# Altium PCB PCB1_DEC17.pcbdoc (part 1 of 2)
Units mil, origin at the board's own origin, x right, y up, seen from the top; angles counter-clockwise.
Board outline 5000 x 5000 mil, 2 copper layers (Top Layer, Bottom Layer); 78 components, 60 nets, 282 pads, 32 vias.
Unrouted connection lines stored in the file: 84.
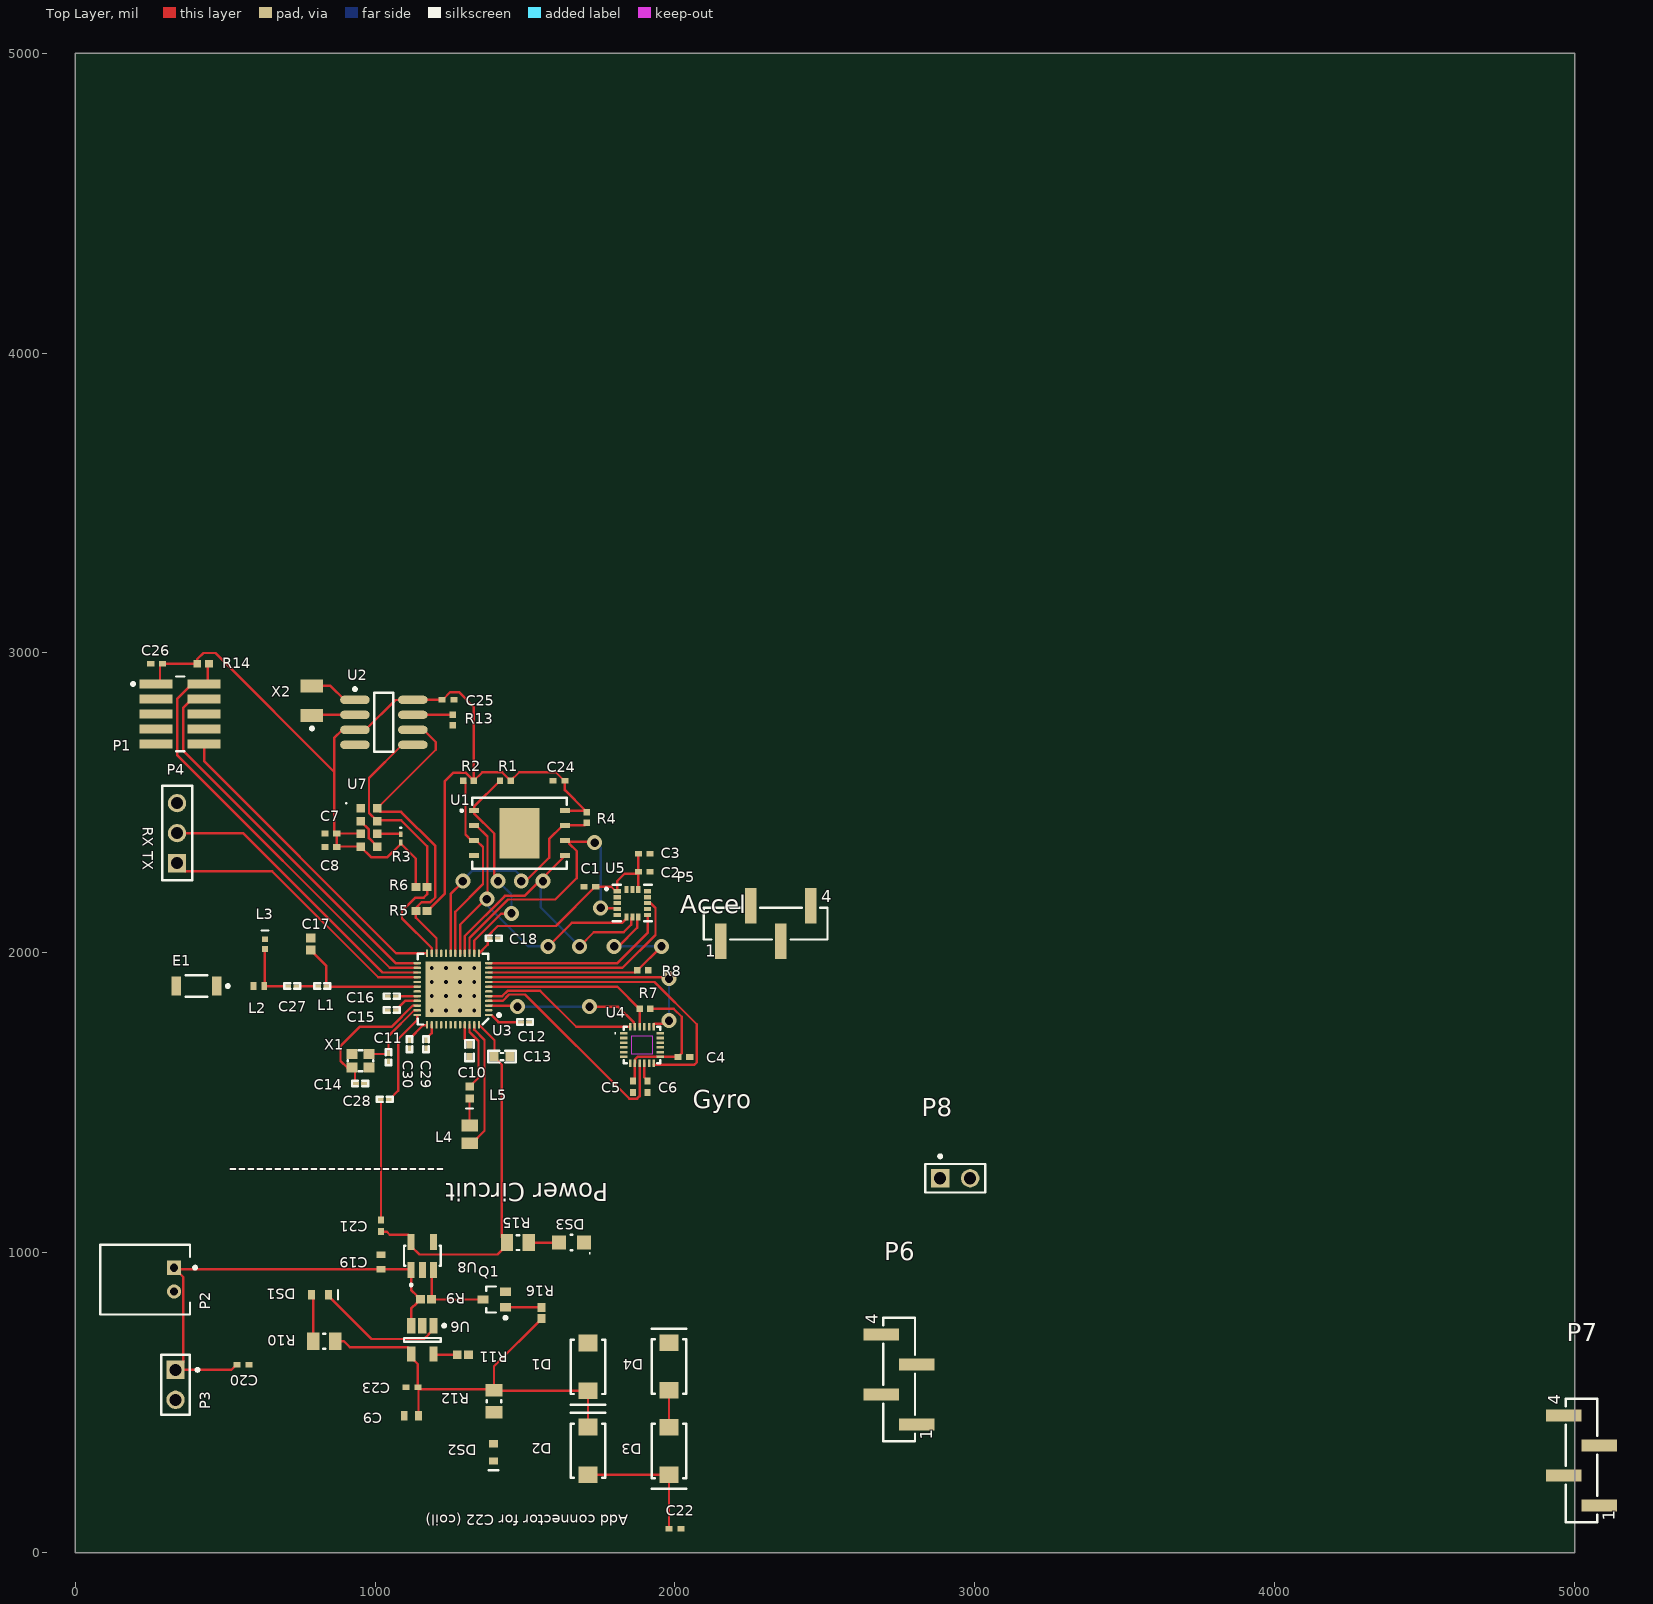
[diagram p0: Top Layer view]
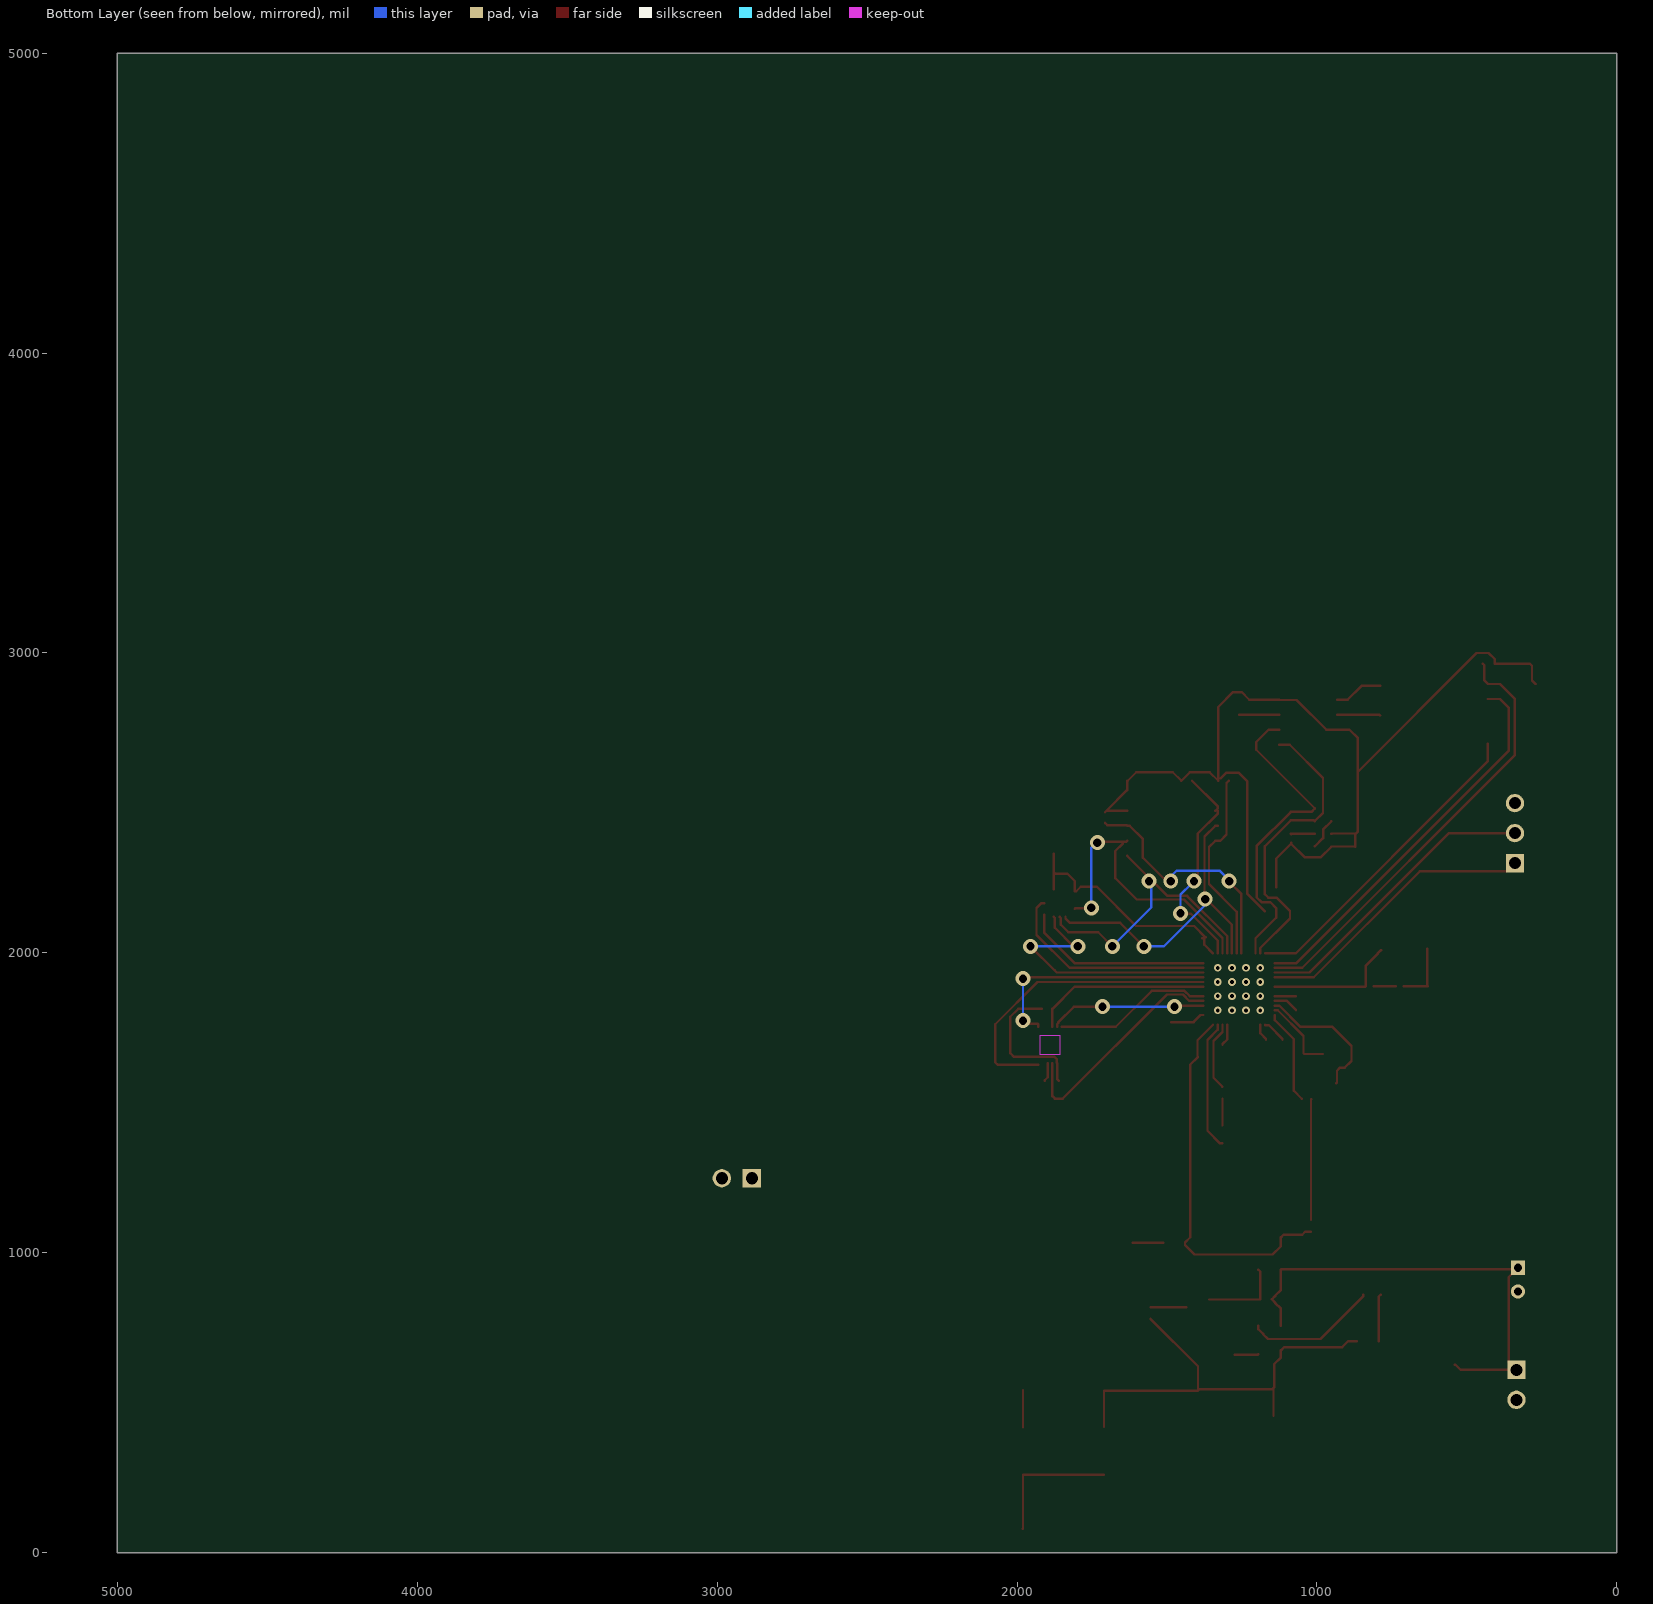
[diagram p1: Bottom Layer view, seen from below]

## Layer stack, top to bottom
Top Solder: solder mask 0.4, Solder Resist, Dk 3.5
Top Layer: signal copper 1.4
Dielectric 1: dielectric 12.6, FR-4, Dk 4.8
Bottom Layer: signal copper 1.4
Bottom Solder: solder mask 0.4, Solder Resist, Dk 3.5

## Board outline
0,5000 5000,5000 5000,0 0,0

## Design rules (kind name [scope] priority, off if disabled: settings)
Clearance [All] p1: gap=4 ignorepadtopadclearanceinfootprint=TRUE except(0: Arc-Hole Track-Hole SMDPad-Hole THPad-Hole Via-Hole Fill-Hole Poly-Hole Region-Hole Text-Hole)
PolygonConnect [All] p1: connectstyle=Relief reliefconductorwidth=10 reliefentries=4 polygonreliefangle="90 Angle" airgapwidth=10
RoomDefinition SimPL_IMU_v1_0_NOV23 [InComponentClass('SimPL_IMU_v1_0_NOV23')] p1: confinementstyle=ConfineIn formatcopy=TRUE lockcomponents=FALSE outline 5045,65 5635,65 5635,315 5045,315
RoomDefinition "SimPL_IMU_v1_1 _NOV23" [InComponentClass('SimPL_IMU_v1_1 _NOV23')] p2: confinementstyle=ConfineIn formatcopy=TRUE lockcomponents=FALSE outline 7045,1560 13805,1560 13805,2115 7045,2115
RoutingVias [All] p1: holewidth=28 width=50 viastyle="Through Hole" minholewidth=28 minwidth=50 maxholewidth=28 maxwidth=50
SolderMaskExpansion [All] p1: expansion=4
Width [All] p1: maxlimit=10 minlimit=4 preferedwidth=6 minimp=50.000000 maximp=50.000000 favimp=50.000000
30 further rules are at their usual default settings.

## Classes and differential pairs
component class "SimPL_IMU_v1_1 _NOV23": C10 C11 C12 C13 C14 C15 C16 C17 C18 C24 C25 C26 C27 C28 C29 C30 E1 L1 L2 L3 L4 L5 P1 P4 P5 P6 P7 P8 R1 R2 R4 R5 R6 R13 R14 U1 U2 U3 X1 X2
component class SimPL_IMU_v1_0_NOV23: C1 C2 C3 C4 C5 C6 C7 C8 C9 C19 C20 C21 C22 C23 D1 D2 D3 D4 DS1 DS2 DS3 P2 P3 Q1 R3 R7 R8 R9 R10 R11 R12 R15 R16 U4 U5 U6 U7 U8

## Components (designator, comment, footprint, x,y, rotation, side; value= is the part's Value field where it differs from the comment)
C1 "0.1uF" 0402 1716.19,2220.4 r180 top
C2 "0.1uF" 0402 1897.78,2270.4 r0 top
C3 "1.0uF" 0402 1897.78,2330.4 r0 top
C4 "0.1uF" 0402 2029.68,1653.25 r0 top
C5 "0.1uF" 0402 1860.63,1553.56 r270 top
C6 "0.1uF" 0402 1907.87,1553.56 r270 top
C7 "0.1uF" 0402 852.61,2398.03 r180 top
C8 "2.2uF" 0402 852.61,2353.03 r180 top
C9 "4.7uF" CAPC1005X65X10ML15 1120.98,456.81 r0 top
C10 "1.0µF" CAPC1005X04L 1315.12,1674 r270 top
C11 "12pF" CAPC0603X03L 1045,1651.48 r90 top
C12 "100nF" CAPC0603X03L 1500,1769.31 r0 top
C13 "4.7µF" CAPC1608X06L 1423.42,1654.31 r0 top
C14 "12pF" CAPC0603X03L 950,1564.31 r180 top
C15 "100pF" CAPC0603X03L 1056,1809.31 r180 top
C16 "100pF" CAPC0603X03L 1056,1855.5 r0 top
C17 "0.8pF" CAPC1006X50X20ML10T10 785,2029.31 r270 top
C18 "100nF" CAPC0603X03L 1396.28,2048.9 r0 top
C19 "4.7uF" CAPC1005X65X10ML15 1020,968.86 r270 top
C20 "1uF" 0402 559.68,626.81 r0 top
C21 "1uF" 0402 1020,1090.16 r90 top
C22 "6.8nF" 0402 2000.31,79.84 r0 top
C23 "220uF" 0402 1123.19,551.81 r180 top
C24 "0.1uF" 0402 1613.35,2573.97 r180 top
C25 "2.2uF" 0402 1243.26,2843.9 r0 top
C26 "0.1uF" 0402 271.98,2963.93 r180 top
C27 "1.0pF" CAPC0603X03L 724.08,1889.31 r0 top
C28 "100nF" CAPC0603X03L 1032.5,1511.81 r180 top
C29 "12pF" CAPC0603X03L 1170,1695.59 r90 top
C30 "12pF" CAPC0603X03L 1115,1695.59 r90 top
D1 "STPS1H100A" STM-SMA-2_V 1710,619.84 r270 top
D2 "STPS1H100A" STM-SMA-2_V 1710,339.84 r90 top
D3 "STPS1H100A" STM-SMA-2_V 1980,339.17 r270 top
D4 "STPS1H100A" STM-SMA-2_V 1980,620.51 r90 top
DS1 "red LED" VISH-TLMS1000_V 816.46,859.84 r0 top
DS2 "red LED" VISH-TLMS1000_V 1395,334.84 r270 top
DS3 "LTST-C170KGKT" LTST-LTST-C170KGKT-2_V 1655,1033.99 r180 top
E1 "2450AT18A100E" JT-2450AT18A100-2_V 404.79,1889.31 r180 top
L1 "3.3nH" INDC0603X03L 824.09,1889.31 r180 top
L2 "3.9nH" *INDC1006X60N 612.86,1889.31 r180 top
L3 "2.7nH" INDC1005X55X25LL05T10_A 632.86,2029.31 r270 top
L4 "10uH" MURA-IND0805_L 1315.12,1394.59 r90 top
L5 "15nH" INDC1005X55X25ML05T10_A 1315.12,1534.31 r90 top
P1 "10pin header" SMTC-FTSH-105-01-L-DV_V 349.88,2796.61 r270 top
P2 "Battery Header" JST-S2B-PH-K-S_V 233.54,910.47 r270 top
P3 "2pin header" AMPH-68000-102HLF_V 335,559.84 r270 top
P4 "3pin" SMTC-TSW-103-07-X-S 340,2299.31 r90 top
P5 "61000418221" 61000418221 2302.5,2097.48 r0 top
P6 "61000418221" 61000418221 2747.5,577.5 r90 top
P7 "61000418221" 61000418221 5022.5,307.5 r90 top
P8 "2pin header" AMPH-68000-102HLF_V 2934.37,1248.54 r0 top
Q1 "BSS138W-7-F" DIOD-SOT323-3_V 1397.5,844.31 r180 top
R1 "10k" RESC1005X40X25NL05T05 1434.37,2573.97 r0 top
R2 "10k" RESC1005X40X25NL05T05 1311.65,2573.97 r0 top
R3 "8.2k" 0603 1086.16,2381.69 r270 top
R4 "10k" RESC1005X40X25NL05T05 1706.65,2451.26 r90 top
R5 "2.2K" RESC1005X40X25ML10T10 1155,2139.31 r0 top
R6 "2.2K" RESC1005X40X25ML10T10 1155,2219.31 r180 top
R7 "10k" RESC1005X40X25NL05T05 1900,1813.25 r0 top
R8 "10k" RESC1005X40X25NL05T05 1892.5,1941.81 r0 top
R9 "2.2K" RESC1005X40X25ML10T10 1170,844.84 r180 top
R10 "330" RESC2013X50X30NL20T20 830.38,704.84 r0 top
R11 "2.2K" RESC1005X40X25ML10T10 1292.73,659.84 r180 top
R12 "330" RESC2013X50X30NL20T20 1396.8,504.76 r90 top
R13 "1k" RESC1005X40X25NL05T05 1259.51,2776.61 r90 top
R14 "100k" RESC1005X40X25ML05T05 426.9,2964.17 r180 top
R15 "330" RESC2013X50X30NL20T20 1476.42,1033.99 r180 top
R16 "2.2K" RESC1005X40X25ML10T10 1555,799.31 r270 top
U1 "MT25QL256ABA1EW9-0SIT" *SON127P600X800X80-9N 1481.65,2398.97 r0 top
U2 "DS1388Z-33+T&R" S8+4_M 1029.51,2768.9 r0 top
U3 "nRF52832-QFAA" QFN40P600X600X90-48N 1260,1879.31 r180 top
U4 "ICM-20649" *QFN40P300X300X95-24N 1890,1692.7 r0 top
U5 "ADXL372BCCZ-RL7" *PQFN50P322X300X114-16N 1858.09,2165.96 r0 top
U6 "MCP73831T-2ATI/OT" SOT-23-OT5_M 1157.72,709.84 r270 top
U7 "VCNL4040M3OE" *VISHAY_VCNL4040_4X2X1.1 979.57,2418.03 r0 top
U8 "AP2112K-3.3TRG1" *SOT95P285X140-5N 1157.72,989.84 r90 top
X1 "32MHz" BT-XTAL_2016 951.46,1640.06 r0 top
X2 "32.768KHz-T" ABRA-ABS07-2_V 789.51,2840.83 r90 top

## Footprints (in the part's own frame and the unit in brackets; to place one, negate y for a bottom-side part, rotate by r counter-clockwise, add the part's x,y. Pads: shape width x height; smd on the part's side, far side on the other; paste and mask are expansions set on the pad)
0402 [mm] "Chip Capacitor, Body 1.0x0.5mm, IPC High Density"
  rect 0.6x0.5 smd: 1(-0.5,0) 2(0.5,0)
  body extent -0.55,-0.3 0.55,0.3, height 1.3
0603 [mm] "Chip Inductor, Body 0.6x0.3mm, IPC High Density"
  rect 0.5x0.3 smd: 1(-0.35,0) 2(0.35,0)
  silkscreen extent -0.9,-0.05 -0.9,0.05, body extent -0.33,-0.18 0.33,0.18, height 0.55
61000418221 [mm] "Pin Header, pitch 2.54 mm, SMD, Vertical, single row, 4p"
  rect 1x3 smd: 1(-3.81,-1.5) 2(-1.27,1.5) 3(1.27,-1.5) 4(3.81,1.5)
  silkscreen extent -5.23,-1.35 5.23,1.34, body extent -5.08,-2.5 5.08,2.5, height 9.33
*INDC1006X60N [mm]
  rect 0.49x0.7 smd: 1(-0.453,0) 2(0.453,0)
*PQFN50P322X300X114-16N [mm]
  rect 0.6x0.35 smd: 1(-1.285,1) 2(-1.285,0.5) 3(-1.285,0) 4(-1.285,-0.5) 5(-1.285,-1) 9(1.285,-1) 10(1.285,-0.5) 11(1.285,0) 12(1.285,0.5) 13(1.285,1)
  rect 0.35x0.6 smd: 6(-0.5,-1.165) 7(0,-1.165) 8(0.5,-1.165) 14(0.5,1.165) 15(0,1.165) 16(-0.5,1.165)
  silkscreen extent -2.3,-1.55 1.65,1.55
*QFN40P300X300X95-24N [mm]
  rect 0.64x0.22 smd: 1(-1.545,1) 2(-1.545,0.6) 3(-1.545,0.2) 4(-1.545,-0.2) 5(-1.545,-0.6) 6(-1.545,-1) 13(1.545,-1) 14(1.545,-0.6) 15(1.545,-0.2) 16(1.545,0.2) 17(1.545,0.6) 18(1.545,1)
  rect 0.22x0.64 smd: 7(-1,-1.545) 8(-0.6,-1.545) 9(-0.2,-1.545) 10(0.2,-1.545) 11(0.6,-1.545) 12(1,-1.545) 19(1,1.545) 20(0.6,1.545) 21(0.2,1.545) 22(-0.2,1.545) 23(-0.6,1.545) 24(-1,1.545)
  Keep-Out Layer region: -0.85,0.77 0.85,0.77 0.85,-0.77 -0.85,-0.77
  Keep-Out Layer region: -0.85,0.77 0.85,0.77 0.85,-0.77 -0.85,-0.77
  Keep-Out Layer region: -0.85,0.77 0.85,0.77 0.85,-0.77 -0.85,-0.77
  Keep-Out Layer region: -0.85,0.77 0.85,0.77 0.85,-0.77 -0.85,-0.77
  Keep-Out Layer region: -0.85,0.77 0.85,0.77 0.85,-0.77 -0.85,-0.77
  Keep-Out Layer region: -0.85,0.77 0.85,0.77 0.85,-0.77 -0.85,-0.77
  silkscreen extent -2.3,-1.55 1.55,1.55
*SON127P600X800X80-9N [mm]
  rect 0.84x0.42 smd: 1(-3.845,1.905) 2(-3.845,0.635) 3(-3.845,-0.635) 4(-3.845,-1.905) 5(3.845,-1.905) 6(3.845,-0.635) 7(3.845,0.635) 8(3.845,1.905)
  rect 3.4x4.3 smd: 9(0,0)
  silkscreen extent -4.99,-3 4,3
*SOT95P285X140-5N [mm]
  rect 1.35x0.6 smd: 1(-1.185,0.95) 2(-1.185,0) 3(-1.185,-0.95) 4(1.185,-0.95) 5(1.185,0.95)
  silkscreen extent -2.57,-1.55 0.85,1.55
*VISHAY_VCNL4040_4X2X1.1 [mm]
  rect 0.7x0.725 smd: 1(-0.7,1.612) 2(-0.7,0.538) 3(-0.7,-0.537) 4(-0.7,-1.613) 5(0.7,-1.613) 6(0.7,-0.537) 7(0.7,0.538) 8(0.7,1.612)
  silkscreen extent -1.96,2 -1.86,2.1
ABRA-ABS07-2_V [mm] "Hand Drawn, 2-Leads, Body 3.2x1.5mm, Pitch 2.5mm"
  rect 1.1x1.9 smd: 1(-1.25,0) 2(1.25,0)
  silkscreen extent -2.47,-0.13 -2.23,0.12, body extent -1.6,-0.75 1.6,0.75, height 0.9
AMPH-68000-102HLF_V [mm] "THD, 2-Leads, Body 5.08x2.41mm, Pitch 2.54mm"
  rect 1.55x1.55 hole 1.02: 1(-1.27,0)
  round 1.55 hole 1.02: 2(1.27,0)
  silkscreen extent -2.54,-1.2 2.54,1.98, body extent -2.54,-1.2 2.54,1.2, height 8.38
BT-XTAL_2016 [mm]
  rect 0.95x0.85 smd: 1(-0.725,-0.575) 2(0.725,-0.575) 3(0.725,0.575) 4(-0.725,0.575)
  silkscreen extent -1.08,-0.88 1.08,0.88, body extent -1.05,-0.85 1.05,0.85, height 0.56
CAPC0603X03L [mm]
  rect 0.5x0.3 smd: 1(-0.35,0) 2(0.35,0)
  silkscreen extent -0.68,-0.23 0.68,0.23, body extent -0.3,-0.15 0.31,0.15, height 0.3
CAPC1005X04L [mm]
  rect 0.6x0.5 smd: 1(-0.5,0) 2(0.5,0)
  silkscreen extent -0.9,-0.35 0.9,0.35, body extent -0.51,-0.25 0.51,0.25, height 0.5
CAPC1005X65X10ML15 [mm] "Chip Capacitor, 2-Leads, Body 1.15x0.65mm, IPC Low Density"
  rect 0.56x0.78 smd: 1(-0.61,0) 2(0.61,0)
  body extent -0.57,-0.33 0.58,0.32, height 0.65
CAPC1006X50X20ML10T10 [mm] "Chip Capacitor, 2-Leads, Body 1.00x0.55mm, IPC Low Density"
  rect 0.74x0.8 smd: 1(-0.51,0) 2(0.51,0)
  body extent -0.55,-0.33 0.55,0.32, height 0.5
CAPC1608X06L [mm]
  rect 0.75x0.8 smd: 1(-0.675,0) 2(0.675,0)
  silkscreen extent -1.17,-0.5 1.17,0.5, body extent -0.8,-0.43 0.8,0.43, height 0.8
DIOD-SOT323-3_V [mm] "SOT323, 3-Leads, Body 2.2x1.35mm, Pitch 0.65mm"
  rect 0.9x0.7 smd: 1(-0.95,0.65) 2(-0.95,-0.65) 3(0.95,0)
  silkscreen extent -1.08,-1.1 0.67,1.67, body extent -1.1,-1.1 1.1,1.1, height 1.07
INDC0603X03L [mm]
  rect 0.5x0.3 smd: 1(-0.35,0) 2(0.35,0)
  silkscreen extent -0.68,-0.23 0.68,0.23, body extent -0.31,-0.16 0.31,0.16, height 0.26
INDC1005X55X25LL05T10_A [mm] "Chip Inductor, 2-Leads, Body 1.05x0.55mm, IPC High Density"
  rect 0.49x0.52 smd: 1(-0.405,0) 2(0.405,0)
  silkscreen extent -1.15,-0.27 -1.15,0.27, body extent -0.52,-0.28 0.53,0.28, height 0.55
INDC1005X55X25ML05T10_A [mm] "Chip Inductor, 2-Leads, Body 1.05x0.55mm, IPC Low Density"
  rect 0.69x0.72 smd: 1(-0.505,0) 2(0.505,0)
  silkscreen extent -1.35,-0.27 -1.35,0.27, body extent -0.52,-0.28 0.53,0.28, height 0.55
JST-S2B-PH-K-S_V [mm] "THD, 2-Leads, Body 7.6x5.9mm, Pitch 2mm"
  rect 1.2x1.2 hole 0.7: 1(-1,2.45)
  round 1.2 hole 0.7: 2(1,2.45)
  silkscreen extent -2.95,-3.8 2.95,4.35, body extent -2.95,-3.8 2.95,3.8, height 4.8
JT-2450AT18A100-2_V [mm] "Chip Antenna, 2-Leads, Body 3.4x1.8mm"
  rect 0.8x1.6 smd: 1(-1.7,0) 2(1.7,0)
  silkscreen extent -2.78,-0.9 0.91,0.9, body extent -1.7,-0.9 1.7,0.9, height 1.4
LTST-LTST-C170KGKT-2_V [mm] "SMD, 2-Leads, Body 2.00x1.25mm"
  rect 1.2x1.2 smd: 1(-1.05,0) 2(1.05,0)
  silkscreen extent -1.6,-0.65 0.05,0.95, body extent -1,-0.63 1,0.63, height 1.1
MURA-IND0805_L [mm] "Chip Inductor, 2-Leads, Body 2.2x1.45mm, IPC High Density"
  rect 0.99x1.39 smd: 1(-0.755,0) 2(0.755,0)
  body extent -1.1,-0.72 1.1,0.72, height 1.45
QFN40P600X600X90-48N [mm]
  oval 0.65x0.2 smd: 1(-3.025,2.2) 2(-3.025,1.8) 3(-3.025,1.4) 4(-3.025,1) 5(-3.025,0.6) 6(-3.025,0.2) 7(-3.025,-0.2) 8(-3.025,-0.6) 9(-3.025,-1) 10(-3.025,-1.4) 11(-3.025,-1.8) 12(-3.025,-2.2) 25(3.025,-2.2) 26(3.025,-1.8) 27(3.025,-1.4) 28(3.025,-1) 29(3.025,-0.6) 30(3.025,-0.2) 31(3.025,0.2) 32(3.025,0.6) 33(3.025,1) 34(3.025,1.4) 35(3.025,1.8) 36(3.025,2.2)
  oval 0.2x0.65 smd: 13(-2.2,-3.025) 14(-1.8,-3.025) 15(-1.4,-3.025) 16(-1,-3.025) 17(-0.6,-3.025) 18(-0.2,-3.025) 19(0.2,-3.025) 20(0.6,-3.025) 21(1,-3.025) 22(1.4,-3.025) 23(1.8,-3.025) 24(2.2,-3.025) 37(2.2,3.025) 38(1.8,3.025) 39(1.4,3.025) 40(1,3.025) 41(0.6,3.025) 42(0.2,3.025) 43(-0.2,3.025) 44(-0.6,3.025) 45(-1,3.025) 46(-1.4,3.025) 47(-1.8,3.025) 48(-2.2,3.025)
  rect 4.7x4.7 smd: 49(0,0)
  silkscreen extent -4.03,-3 3,3, body extent -3.02,-3.02 3.02,3.02, height 0.86
RESC1005X40X25ML05T05 [mm] "Chip Resistor, 2-Leads, Body 1.05x0.55mm, IPC Low Density"
  rect 0.65x0.65 smd: 1(-0.5,0) 2(0.5,0)
  body extent -0.53,-0.28 0.53,0.28, height 0.4
RESC1005X40X25ML10T10 [mm] "Chip Resistor, 2-Leads, Body 1.00x0.50mm, IPC Low Density"
  rect 0.75x0.7 smd: 1(-0.475,0) 2(0.475,0)
  body extent -0.55,-0.3 0.55,0.3, height 0.4
RESC1005X40X25NL05T05 [mm] "Chip Resistor, 2-Leads, Body 1.05x0.55mm, IPC Medium Density"
  rect 0.55x0.55 smd: 1(-0.45,0) 2(0.45,0)
  body extent -0.53,-0.28 0.53,0.28, height 0.4
RESC2013X50X30NL20T20 [mm] "Chip Resistor, 2-Leads, Body 2.00x1.25mm, IPC Medium Density"
  rect 1.05x1.45 smd: 1(-0.925,0) 2(0.925,0)
  silkscreen extent -0.1,-0.62 0.1,0.63, body extent -1.1,-0.72 1.1,0.72, height 0.5
S8+4_M [mm] "SOIC, 8-Leads, Body 4.9x3.9mm, Pitch 1.27mm, IPC Low Density"
  oval 2.5x0.7 smd: 1(-2.45,1.905) 2(-2.45,0.635) 3(-2.45,-0.635) 4(-2.45,-1.905) 5(2.45,-1.905) 6(2.45,-0.635) 7(2.45,0.635) 8(2.45,1.905)
  silkscreen extent -2.57,-2.5 0.8,2.93, body extent -2,-2.5 2,2.5, height 1.75
SMTC-FTSH-105-01-L-DV_V [mm] "CONN, 10-Leads, Body 6.35x3.43mm, Pitch 1.27mm"
  rect 0.74x2.79 smd: 1(-2.54,-2.035) 2(-2.54,2.035) 3(-1.27,-2.035) 4(-1.27,2.035) 5(0,-2.035) 6(0,2.035) 7(1.27,-2.035) 8(1.27,2.035) 9(2.54,-2.035) 10(2.54,2.035)
  silkscreen extent -3.18,-4.1 3.17,0.34, body extent -3.17,-2.92 3.18,2.92, height 5.96
SMTC-TSW-103-07-X-S [mm] ".025 SQ Post Terminal Strip Assembly, 1x3 Pins, Vertical, 2.54mm Pitch, Male"
  rect 1.55x1.55 hole 1.02: 1(0,0)
  round 1.55 hole 1.02: 2(2.54,0) 3(5.08,0)
  silkscreen extent -1.46,-1.27 6.54,1.27, body extent -1.27,-1.27 6.35,1.27, height 8.38
SOT-23-OT5_M [mm] "SOT23, 5-Leads, Body 2.9x1.7mm, Pitch 0.95mm, Lead Span 2.8mm, IPC Low Density"
  rect 1.3x0.7 smd: 1(-1.2,0.95) 2(-1.2,0) 3(-1.2,-0.95) 4(1.2,-0.95) 5(1.2,0.95)
  silkscreen extent -1.32,-1.55 0.15,1.98, body extent -0.9,-1.55 0.9,1.55, height 1.45
STM-SMA-2_V [mm] "Diode, 2-Leads, Body 4.6x2.9mm"
  rect 1.4x1.64 smd: 1(-2.015,0) 2(2.015,0)
  silkscreen extent -2.3,-1.45 3.22,1.45, body extent -2.3,-1.45 2.3,1.45, height 2.59
VISH-TLMS1000_V [mm] "SMD, 2-Leads, Body 0.8x1.6mm"
  rect 0.6x0.8 smd: 1(-0.725,0) 2(0.725,0)
  silkscreen extent 1.52,-0.4 1.52,0.4, body extent -0.8,-0.4 0.8,0.4, height 0.65

## Part data
C1 C2 C4 C5 C6 C7 C8 C20 C21 C22 C23 C24 C25 C26: library part 0.1UF-0402-16V-10%, "0.1µF ceramic capacitors    A capacitor is a passive two-terminal electrical component used to store electrical energy temporarily in an electric field.", DeviceName=-0402-16V-10%, DeviceSetName=0.1UF, GateName_1=G$1, LibraryName=SparkFun-Capacitors, PROD_ID=CAP-12416, SymbolName_1=CAP
C3: library part 1.0UF-0402-16V-10%, "1µF ceramic capacitors    A capacitor is a passive two-terminal electrical component used to store electrical energy temporarily in an electric field.", DeviceName=-0402-16V-10%, DeviceSetName=1.0UF, GateName_1=G$1, LibraryName=SparkFun-Capacitors, PROD_ID=CAP-12417, SymbolName_1=CAP
C9 C19: library part CMP-2000-05438-1, "Chip Capacitor, 4.7 uF, +/- 20%, 10 V, -55 to 85 degC, 0402 (1005 Metric), RoHS, Tape and Reel", Capacitance=4.7µF, Manufacturer=TDK, Operating Temperature=-55degC~85degC, Package / Case=0402(1005Metric), PCN Part Number=MLCCPartNumberChange30/Nov/2012, Ratings=-, Standard Package=1, Temperature Coefficient=X5R, Tolerance=±20%, Voltage - Rated=10V, Applications=GeneralPurpose, Category=Capacitors, Datasheet URL=https://datasheet.ciiva.com/24216/c1005x5r1a475m050bc-264317-24216438.pdf, Datasheet Version=Sep-13, Family=CeramicCapacitors, Features=-, Height - Seated (Max)=-, Kits=445-9021-KIT-ND-KITMLCC100PF-10UF04026.3-50V445-9003-KIT-ND-KITCAPCERHICAPMLCCSMD, Lead Spacing=-, Lead Style=-, Manufacturer URL=http://www.tdk.com/, Mounting Type=SurfaceMount,MLCC, Online Catalog=CSeries,GeneralPurpose, Other Names=445-8023-1, Packaging=CutTape(CT), Product Training Modules=CSeriesGeneralApplicationsSEAT,CCV,andTVCLDesignToolsGuidetoReplacinganElectrolyticCapacitorwithanMLCC, RoHS Information=RoHSCertificate-MLCC, Series=C, Size / Dimension="0.039\"Lx0.020\"W(1.00mmx0.50mm)", Thickness (Max)=-
C10: library part C0402-1µ0, "Capacitor, X5R, ±5%", Artikkelnr Noca=20039235, Artikkelnr Simpro=N.A., Footprint Doc=0402, LatestRevisionDate=2009-11-23, Note=6.3V, Part Number=C0402-1µ0, Pin Count=2, Published=2009-05-08, Publisher="Nordic Semiconductor"
C11 C14 C29 C30: library part C0201-12p, "Capacitor, NP0, ±2%", Artikkelnr Noca=N.A., Artikkelnr Simpro=N.A., Footprint Doc=0201, LatestRevisionDate=2014-11-13, Note=50V, Part Number=C0201-12p, Pin Count=2, Published=2014-11-13, Publisher="Nordic Semiconductor"
C12 C18 C28: library part C0201-100n, "Capacitor, X7R, ±10%", Artikkelnr Noca=N.A., Artikkelnr Simpro=N.A., Footprint Doc=0201, LatestRevisionDate=2014-11-13, Note=16V, Part Number=C0201-100n, Pin Count=2, Published=2014-11-13, Publisher="Nordic Semiconductor"
C13: library part C0603-4µ7, "Capacitor, X5R, ±10%", Artikkelnr Noca=20069060, Artikkelnr Simpro=N.A., Footprint Doc=0603, LatestRevisionDate=2009-11-23, Note=6.3V, Part Number=C0603-4µ7, Pin Count=2, Published=2009-05-08, Publisher="Nordic Semiconductor"
C15 C16: library part C0201-100p, "Capacitor, NP0, ±5%", Artikkelnr Noca=N.A., Artikkelnr Simpro=N.A., Footprint Doc=0201, LatestRevisionDate=2014-11-13, Note="Chip Cap 1%", Part Number=C0201-100p, Pin Count=2, Published=2014-11-13, Publisher="Nordic Semiconductor"
C17: library part CMP-2008-04732-1, Manufacturer="AVX Interconnect / Elco", Part Number=04023J0R8PBSTR
C27: library part C0201-1.0p, "Capacitor, NP0, ±5%", Artikkelnr Noca=N.A., Artikkelnr Simpro=N.A., Footprint Doc=0201, LatestRevisionDate=2014-11-13, Note="Chip Cap 1%", Part Number=C0201-1.0p, Pin Count=2, Published=2014-11-13, Publisher="Nordic Semiconductor"
D1 D2 D3 D4: library part CMP-2000-07173-1, "High Voltage Power Schottky Rectifier, 1 A, 100 V, 2-Pin SMD (SMA), RoHS, Tape and Reel", Capacitance @ Vr, F=-, Current - Average Rectified (Io)=1A, Current - Reverse Leakage @ Vr=4µA@100V, Manufacturer=STMicroelectronics, Operating Temperature - Junction=175°C(Max), Package / Case=DO-214AC,SMA, Package Description="2-Pin Surface Mount Device, Body 4.275 x 2.575 mm", Package Reference=SMA, Standard Package=1, Supplier Device Package=SMA(DO-214AC), Voltage - DC Reverse (Vr) (Max)=100V, Voltage - Forward (Vf) (Max) @ If=770mV@1A, Category=DiscreteSemiconductorProducts, Datasheet URL=http://www.st.com/content/ccc/resource/technical/document/datasheet/e8/3c/6a/07/72/b0/40/88/CD00001304.pdf/files/CD00001304.pdf/jcr:content/translations/en.CD00001304.pdf, Datasheet Version=09/2008, Diode Type=Schottky, Family=Diodes,Rectifiers-Single, Kits=497-8006B-KIT-ND-KITSCHOTTKYDIODE11VALUES5EA, Manufacturer URL=http://www.st.com/, Mounting Technology=SurfaceMount, Mounting Type=SurfaceMount, Online Catalog=SchottkyDiode, Other Names=497-3209-1, Other Related Documents=STPS1H100ViewAllSpecifications, Package URL=http://www.st.com/st-web-ui/static/active/en/resource/technical/document/datasheet/CD00283518.pdf, Packaging=CutTape(CT), Reverse Recovery Time (trr)=-, Series=-, Speed=FastRecovery=200mA(Io)
DS1 DS2: library part CMP-2000-07254-1, "Low Current LED, 40 mW, 1.8 V, -40 to 100 degC, 2-Pin SMD (0603), RoHS, Tape and Reel", Forward Current If=2mA, Forward Voltage=1.8V, LED Colour=Red, Manufacturer=Vishay, Package Description="2-Pin Surface Mount Device, Body 1.6 x 0.8 mm", Package Reference=TLMS1000, Automotive Qualification Standard=AEC-Q100, Bulb Size=1.6mmx0.8mm, Datasheet URL=https://datasheet.ciiva.com/5798/1698881-5798337.pdf, Datasheet Version="Rev. 1.7, 02/2011", LED Mounting=SMD, Lens Shape=Rectangular, Luminous Intensity=4mcd, Manufacturer URL=http://www.vishay.com/, Mounting Technology=SurfaceMount, MSL=MSL2-1year, Packaging=CutTape, Product Range=-, SVHC=ToBeAdvised, Viewing Angle=80°, Wavelength Typ=636nm
DS3: library part CMP-2000-06620-1, "Ultra Bright AlInGaP Chip LED, 75 mW, -55 to 85 degC, 2-Pin SMD (0805), RoHS, Tape and Reel", Emitting Color=YellowGreen, Forward Current=30mA, Forward Voltage=2.4V, Manufacturer=Lite-On, Operating Temperature Classification=Industrial, Operating Temp Range=-55Cto85C, Package Description="2-Pin Surface Mounted Device, Body 2 x 1.25 mm", Package Reference=LTST-C170KGKT-2, Package Type=ChipLed, Power Dissipation=75W, Power Dissipation Max=75mW, Reverse Voltage=5V, Test Current (It)=20mA, Chip Material=AlGaInP, Datasheet URL=http://optoelectronics.liteon.com/upload/download/DS22-2000-073/S_110_LTST-C170KGKT.pdf, Datasheet Version="Rev. G, 06/2005", DELETED=Compliant, Dominant Wave Length=571nm, Forward Current Max=30mA, High Brightness=Yes, Lens Dimensions=1.4x1.25x0.6mm, Luminous Intensity=35mcd, Lum Intensity=35mcd, Main Category=ChipLED, Manufacturer URL=http://www.us.liteon.com/, Mounting=SurfaceMount, Mounting Technology=SurfaceMount, Number of  Elements=1, Packaging=TapeandReel, Peak Wavelength=574nm, Pin Count=2, Product Depth (mm)=1.25mm, Product Height (mm)=1.1mm, Product Length (mm)=2mm, Rad Hardened=No, Shape Type=Rectangular, Type=Uni-Color, Viewing Angle=130deg
E1: library part CMP-2000-05167-1, "Ceramic Antenna, 2.45 GHZ, 2 W, -40 to 125 degC, 2-Pin SMD, RoHS, Tape and Reel", Manufacturer="Johanson Technology", Maximum Frequency=2500MHz, Minimum Frequency=2400MHz, Package=2Case18-4, Category=Antenna, Datasheet URL=http://www.johansontechnology.com/datasheets/antennas/2450AT18A100.pdf, Datasheet Version="Rev. 1.3, 07/2014", Manufacturer URL=https://www.johansontechnology.com/, Type=Ceramic, Typical Antenna Gain=0.5dB
L1: library part L0201-3n3, "High frequency chip inductor ±5%", Artikkelnr Noca=N.A., Artikkelnr Simpro=N.A., Footprint Doc=0201, LatestRevisionDate=2013-04-10, Note="High frequency chip inductor ±5%", Part Number=L0201-3n3, Pin Count=2, Published=2013-04-10, Publisher="Nordic Semiconductor"
L2: library part MHQ1005P3N9CT000, "Inductor, 3.9nh, 0.2nh, 0.9a, 0402", Package="1006 TDK", Availability=Unavailable, MF=TDK, MP=MHQ1005P3N9CT000, Price=None, SnapEDA_Link=https://www.snapeda.com/parts/MHQ1005P3N9CT000/TDK/view-part/?ref=snap
L3: library part CMP-2000-06580-1, "Chip Inductor, 2.7 nH, +/- 0.3 nH, 300 mA, -55 to 125 degC, 0402 (1005 Metric), RoHS, Tape and Reel", Current Rating=300mA, DC Resistance (DCR)=150mOhmMax, Frequency - Self Resonant=6GHz, Frequency - Test=100MHz, Manufacturer=Murata, Operating Temperature=-55°C~125°C, Package / Case=0402(1005Metric), Package Description="2-Pin Surface Mount Device, Body 1 x 0.5 mm", Package Reference=0402, Q @ Freq=8@100MHz, Standard Package=10,000, Tolerance=±0.3nH, Catalog Drawings=LQG15HSSeriesTopLQG15HSSeriesEnd, Category=Inductors,Coils,Chokes, Datasheet URL=http://search.murata.co.jp/Ceramy/image/img/PDF/ENG/L0075S0083LQG15HS.pdf, Datasheet Version=09/2010, Family=FixedInductors, Height - Seated (Max)="0.022\"(0.55mm)", Inductance=2.7nH, Manufacturer URL=http://www.murata.com/, Material - Core=Air, Mounting Technology=SurfaceMount, Mounting Type=SurfaceMount, Online Catalog=LQG15HxSeries, Other Names=490-2615-2, Packaging=Tape&Reel(TR), Product Training Modules=InductorProducts, Series=LQG15HS, Shielding=Unshielded, Size / Dimension="0.039\"Lx0.020\"W(1.00mmx0.50mm)", Type=Multilayer
L4: library part CMP-2000-06587-1, "Fixed Inductor, 10 uH, +/-20%, -55 to 125 degC, 2-Pin SMD (0805), RoHS, Tape and Reel", Case Size/Dimension=0805, DC Resistance=0.6, Inductance-Nom=10H, Manufacturer=Murata, Package Description="2-Pin Surface Mount Device, Body 2 x 1.25 mm", Package Reference=IND0805, Rated Current-Max=100mA, Tolerance (%)=20%, Datasheet URL=http://psearch.en.murata.com/inductor/product/LQM21FN100M70%23.pdf, Datasheet Version=05/2016, Manufacturer URL=http://www.murata.com/, Mounting Technology=SurfaceMount
L5: library part CMP-2100-03652-1, "Chip Inductor, 15 nH, +/- 5%, 100 MHz, -55 to 125 degC, 0402 (1005 Metric), RoHS, Paper Tape", Case/Package=0402, Case Code (Metric)=1005, Current Rating=300mA, DC Resistance (DCR)=320mOhm, Inductance=15nh, Manufacturer=Murata, Max Operating Temperature=125degC, Min Operating Temperature=-55degC, Package Description="2-Pin Surface Mount Device, Body 1 x 0.5 mm", Package Quantity=10000, Self Resonant Frequency=2.5GHz, Test Frequency=100MHz, Tolerance=5%, Case Code (Imperial)=0402, Core Material=Air, Datasheet URL=http://psearch.en.murata.com/inductor/product/LQG15HS15NJ02_.pdf, Datasheet Version=42675.0, DC Current=300mA, Depth=0.55mm, Height=0.5mm, Height - Seated (Max)=0.022inch, Lead Free=LeadFree, Length=1mm, Manufacturer URL=http://www.murata.com/, Max DC Current=300mA, Military Standard=Not, Package Reference=0402, Packaging=TapeandReel, Q Factor=8, Radiation Hardening=No, RoHSCompliant=true, Shielding=Unshielded, Termination=SMD/SMT, Width=0.02inch
P1: library part CMP-2000-05354-1, "Male Header, Pitch 1.27 mm, 2 x 5 Position, Height 5.96 mm, -55 to 125 degC, RoHS, Bulk", Color=Black, Manufacturer=Samtec, Standard Package=1, Catalog Drawings=FTSHSeriesFTSHSeriesSMTSide, Category=Connectors,Interconnects, Connector Type=Header,Unshrouded, Contact Finish=Gold, Contact Finish Thickness=10µin(0.25µm), Contact Mating Length="0.120\"(3.05mm)", Contact Type=MalePin, Datasheet URL=https://datasheet.ciiva.com/30493/0900766b80adfe36-30493006.pdf, Datasheet Version=Feb-08, EDA / CAD Models=DownloadfromAcceleratedDesigns, Family=RectangularConnectors-Headers,MalePins, Fastening Type=-, Featured Product=Board-To-BoardInterconnectSystems, Features=-, Manufacturer URL=http://www.samtec.com/, Mating Products="FLE-105-01-G-DV-TR-ND-CONNSKT1.27MM10POSDUALSMDCLP-105-02-G-D-P-TR-ND-CONNRCPT10POSDUAL.05\"SMDSFMC-105-L2-S-D-TR-ND-CONN.05\"SURFACE10POSSMTSFMH-105-02-L-D-TR-ND-CONNRECEPT10POS.50\"SMTFLE-105-01-G-DV-A-ND-CONNSKT1.27MM10POSDUALSMDCLP-105-02-G-D-BE-ND-CONNRCPT10POSDUAL.05\"SMDFLE-105-01-G-DV-A-P-ND-CONNSKT1.27MM10POSDUALSMDSAM1153-05-ND-CONNRCPT10POSDUAL.05\"SMDSAM1155-05-ND-CONNRCPT10POSDUAL.05\"SMDSAM1154-05-ND-CONNRCPT10POSDUAL.05\"SMDSFMH-105-02-L-D-LC-ND-CONNRECEPT10POS.50\"SMTSAM1226-05-ND-CONNRCPT.05\"10POSDUALSMD", Mounting Type=SurfaceMount, Number of Positions=10, Number of Positions Loaded=All, Number of Rows=2, Online Catalog=FTSHSeries, Other Names=SAM1161-05, Packaging=Bulk, Pitch="0.050\"(1.27mm)", Product Training Modules=Board-to-BoardConnectors, Row Spacing="0.050\"(1.27mm)", Series=FTSH, Termination=Solder
P2: library part CMP-1755-00004-1, "Male Header, Pitch 2 mm, 1 x 2 Position, Height 4.8 mm, Tail Length 3.4 mm, -25 to 85 degC, RoHS, Bulk", Capacitance="10 uF", Case\Package=Radial, Max Operating Temperature="85 degC", Min Operating Temperature="-40 degC", Package Quantity=200, Tolerance=20%, Voltage Rating="50 V", ComponentLink1Description=Datasheet, ComponentLink1URL=http://www.jst-mfg.com/product/pdf/eng/ePH.pdf, DatasheetVersion=Dec-12, Diameter="5 mm", Height="11 mm", Lead Pitch="2 mm", Length="11 mm", Mount="Through Hole", PackageDescription="Male Header, Pitch 2 mm, 1 x 2 Position, Height 4.8 mm, Tail Length 3.4 mm", PackageReference=S2B-PH-K-S, Packaging=Bulk, Pins=2, Radiation Hardening=No, REACH SVHC="No SVHC", RoHSCompliant=true, Voltage Rating (DC)="50 V"
P3 P8: library part CMP-2000-05666-1, "Male Header, Pitch 2.54 mm, 1 x 2 Position, Height 8.38 mm, Tail Length 2.41 mm, RoHS, Bulk", Current Rating=3A, Flammability Rating=UL94V-0, Insulation Resistance=5000MOhms, Manufacturer=FCI, Operating Temperature Range=-65Cto+125C, Package Description="Male Header, Pitch 2.54 mm, 1 x 2 Position, Height 8.38 mm, Tail Length 2.41 mm", Package Reference=68000-102HLF, Voltage Rating=1.5kV, Brand=FCI, Contact Gender=Pin(Male), Contact Material=PhosphorBronze, Contact Plating=Gold/GTX, Datasheet URL=https://datasheet.ciiva.com/5149/68000-274228-5149165.pdf, Datasheet Version="Rev. F, 04/2006", Factory Pack Quantity=100, Housing Material=Thermoplastic, Manufacturer URL=http://www.amphenol.com/, Mating Post Length=5.84mm, Mounting Angle=Vertical, Mounting Style=ThroughHole, Mounting Technology=ThroughHole, Number of Positions=2, Number of Positions / Contacts=2, Number of Rows=1, Packaging=Bulk, Pitch=2.54mm, Product Category=Headers&WireHousings, Product Type=Headers, RoHS=Details, Series=68000, Termination Post Length=2.41mm, Termination Style=ThroughHole, Type=Unshrouded
P4: library part CMP-1024-00333-1, "0.025\" SQ Post Header, Through-hole, Vertical, -55 to 125 degC, 2.54 mm Pitch, 3-Pin, Male, RoHS", Manufacturer=Samtec, PartNumber=TSW-103-07-G-S, Temperature Range="-55 to 125 degC", ComponentLink1Description="Manufacturer URL", ComponentLink1URL=http://www.samtec.com, ComponentLink2Description=Datasheet, ComponentLink2URL=http://www.samtec.com/documents/webfiles/pdf/TSW_TH.PDF, ComponentLink3Description="Package Specification", ComponentLink3URL=http://www.samtec.com/documents/webfiles/cpdf/TSW-XXX-XX-XXX-X-XX-XXX-MKT.pdf, DatasheetVersion=F-214, Mounting Technology=Through-hole, Orientation=Vertical, PackageDescription=".025[0.64] SQ. Post Terminal Strip Assembly", PackageReference=TSW-103-07-X-S, PackageVersion="DM, 8/1988", Pitch="2.54 mm", RoHS=True
P5 P6 P7: library part CMP-1502-01019-1, "SMT Vertical Pin Header WR-PHD, Pitch 2.54 mm, Single Row, 4 pins", Contact Resistance=20mOhm, Manufacturer="Wurth Elektronik", Operating Temperature=-40to125degC, Rated Current=3A, Withstanding Voltage=500VAC, Working Voltage=250VAC, Datasheet URL=https://katalog.we-online.de/em/datasheet/6100xx18221.pdf, Gender=Male, Manufacturer URL=http://www.we-online.de, Mounting Technology=SMT, Orientation=Vertical, Package Reference=61000418221, Packaging=Tube, Part Number=61000418221, Pin Number=4, Pitch=2.54mm, Publisher=WurthElektronik, Row Number=Single
Q1: library part CMP-2000-05968-1, "N-Channel Enhancement Mode Mosfet, 50 V, 200 mA, -55 to 150 degC, 6-Pin SOT-323, RoHS, Tape and Reel", Id - Continuous Drain Current=200mA, Manufacturer=DiodesIncorporated, Maximum Operating Temperature=+150C, Minimum Operating Temperature=-55C, Package / Case=SOT-323-3, Package Description="3-Pin Small Outline Transistor, Body 2 x 1.25 mm, Pitch 0.65 mm", Package Reference=SOT323, Pd - Power Dissipation=200mW, Rds On - Drain-Source Resistance=1.4Ohms, Vds - Drain-Source Breakdown Voltage=75V, Vgs - Gate-Source Voltage=20V, Brand=DiodesIncorporated, Channel Mode=Enhancement, Configuration=Single, Datasheet URL=http://www.diodes.com/_files/datasheets/ds30206.pdf, Datasheet Version="Rev. 11-2, 09/2013", Factory Pack Quantity=3000, Forward Transconductance - Min=0.1S, Height=1mm, Length=2.2mm, Manufacturer URL=http://www.diodes.com/, Mounting Style=SMD/SMT, Mounting Technology=SurfaceMount, Number of Channels=1Channel, Packaging=Reel, Product=MOSFETSmallSignal, Product Category=MOSFET, RoHS=True, Series=BSS138, Technology=Si, Transistor Polarity=N-Channel, Transistor Type=1N-Channel, Type=EnhancementModeFieldEffectTransistor, Typical Turn-Off Delay Time=20ns, Typical Turn-On Delay Time=20ns, Unit Weight=0.000212oz, Width=1.35mm
R1 R2 R4 R7 R8: library part CMP-2002-00607-3, "Chip Resistor, 10 KOhm, +/- 1%, 100 mW, -55 to 155 degC, 0402 (1005 Metric), RoHS, Tape and Reel", Case\/Package=0402, Case Code (Metric)=1005, Manufacturer="Basic Passives", Max Operating Temperature="155 degC", Min Operating Temperature="-55 degC", Package Quantity=10000, PartNumber=ERJ-2RKF1002X, Power Rating="100 mW", Resistance="10 KOhm", Tolerance=1%, Voltage Rating="50 V", Case Code (Imperial)=0402, ComponentLink1Description="Manufacturer URL", ComponentLink1URL=http://www.panasonic.com/, ComponentLink2Description=Datasheet, ComponentLink2URL=http://industrial.panasonic.com/cdbs/www-data/pdf/RDA0000/AOA0000C86.pdf, DatasheetVersion=04/2015, Height="0.35 mm", Length="1 mm", Mount="Surface Mount", Mounting Technology="Surface Mount", PackageDescription="2-Pin Surface Mount Device, Body 1 x 0.5 mm", PackageReference=0402, Packaging="Tape and Reel", Pins=2, Radiation Hardening=No, REACH SVHC=Yes, RoHSCompliant=true, Width="0.5 mm"
R3: library part 8.2KOHM-0603-1/10W-5%, "8.2kΩ resistor    A resistor is a passive two-terminal electrical component that implements electrical resistance as a circuit element. Resistors act to reduce current flow, and, at the same time, act to lower voltage levels within circuits. - Wikipedia", DeviceName=-0603-1/10W-5%, DeviceSetName=8.2KOHM, GateName_1=G$1, LibraryName=SparkFun-Resistors, PROD_ID=RES-10646, SymbolName_1=RESISTOR
R5 R6 R9 R11 R16: library part CMP-2002-06097-1, Manufacturer=Multicomp, Part Number=MC00625W040212K2
R10 R12 R15: library part CMP-2001-03823-1, Manufacturer="Vishay Dale", Part Number=CRCW0805330RFKEA
R13: library part CMP-2002-08276-1, Manufacturer="Vishay Dale", Part Number=CRCW04021K00FKED
R14: library part CMP-2002-08123-2, "Chip Resistor, 100 KOhm, +/- 1%, 0.63 W, -55 to 155 degC, 0402 (1005 Metric), RoHS, Tape and Reel", Case\Package=0402, Case Code (Metric)=1005, Max Operating Temperature="155 degC", Min Operating Temperature="-55 degC", Package Quantity=10000, Power Rating="63 mW", Resistance="100 kohm", Tolerance=1%, Type (Resistor)="Thick Film", Voltage Rating="50 V", Case Code (Imperial)=0402, ComponentLink1Description="Manufacturer URL", ComponentLink1URL=http://www.vishay.com/, ComponentLink2Description=Datasheet, ComponentLink2URL=http://www.vishay.com/docs/20035/dcrcwe3.pdf, DatasheetVersion=06/2012, Height="0.35 mm", Length="1 mm", Mount="Surface Mount", Mounting Technology="Surface Mount", PackageDescription="2-Pin Surface Mount Device, Body 1 x 0.5 mm", PackageReference=0402, Packaging="Tape and Reel", Pins=2, Radiation Hardening=No, REACH SVHC=Unknown, RoHSCompliant=true, Weight="2.3E-05 oz", Width="0.5 mm"
U1: "NOR Flash Serial-SPI 3.3V 256Mbit 256M x 1bit 8-Pin WPDFN", Package="WDFN-8 Micron Technology", Availability=Unavailable, MF="Micron Technology", MP=MT25QL256ABA1EW9-0SIT, Price=None, SnapEDA_Link=https://www.snapeda.com/parts/MT25QL256ABA1EW9-0SIT/Micron%20Technology%20Inc./view-part/?ref=snap
U2: library part CMP-0254-00385-1, "I2C Real-Time Clock/Supervisor with Trickle Charger and 512 Byte EEPROM, 3.3V, 8-Pin SO, -40 to 85 degC, Pb-Free, Reel", Code_IPC=SOIC127P600-8, Code_JEDEC=MS-012-AA, ComponentLink1Description="Manufacturer URL", ComponentLink1URL=http://www.maxim-ic.com, ComponentLink2Description=Datasheet, ComponentLink2URL=http://datasheets.maxim-ic.com/en/ds/DS1388.pdf, ComponentLink3Description="Package Specification", ComponentLink3URL=http://pdfserv.maxim-ic.com/package_dwgs/21-0041.PDF, DatasheetVersion="rev3, Aug-2010", PackageDescription="8-Pin Small-Outline IC, Narrow (0.15in), 1.27 mm Pitch, SOIC (N), Pb-Free", PackageReference=S8+4, PackageVersion="revC, 2010"
U3: "Multi-protocol Bluetooth Low Energy, ANT and 2.4GHz proprietary system-on-chip", Manufacturer="Nordic Semiconductor", Artikkelnr Noca=N.A., Artikkelnr Simpro=N.A., Footprint Doc=QFN-48, LatestRevisionDate=2014-11-26, Manufacturer Part Number=nRF52832-QFAA, Part Number=nRF52832-QFAA, Pin Count=48, Published=2014-11-26, Publisher="Nordic Semiconductor", Supplier="Nordic Semiconductor"
U4: "Wide-Range 6-Axis MEMS MotionTracking Device for Sports and High Impact Applications", Package="QFN-24 InvenSense", Availability=Unavailable, MF="TDK InvenSense", MP=ICM-20649, Price=None, SnapEDA_Link=https://www.snapeda.com/parts/ICM-20649/TDK%20InvenSense/view-part/?ref=snap
U5: "Accelerometer Triple ±200g 2.5V 16-Pin LGA T/R", Package="LGA-16 Analog Devices", Availability=Unavailable, MF="Analog Devices", MP=ADXL372BCCZ-RL7, Price=None, SnapEDA_Link=https://www.snapeda.com/parts/ADXL372BCCZ-RL7/Analog%20Devices%20Inc./view-part/?ref=snap
U6: library part CMP-0133-00144-1, "Miniature Single-Cell, Fully Integrated Li-Ion, Li-Polymer Charge Management Controller, 4.2V, 5-Pin SOT-23, Industrial Temperature, Tape and Reel", Code_IPC=SOT23-5, DatasheetVersion="revE, Sep-2008", PackageDescription="5-Lead Plastic Small Outline Transistor (OT) [SOT-23]", PackageReference=SOT-23-OT5, PackageVersion="revBB, Aug-2009"
U7: "VCNL4040 Series 3.6 V 200 mm 16 Bit I2C SMT Proximity and Ambient Light Sensor", Package="SMD-8 Vishay", Availability=Unavailable, MF=Vishay, MP=VCNL4040M3OE, Price=None, SnapEDA_Link=https://www.snapeda.com/parts/VCNL4040M3OE/Vishay%20Semiconductor%20Opto%20Division/view-part/?ref=snap
U8: "AP2112 Series 0.6 A 3.3 V Fixed Output SMT LDO Linear Regulator - SOT23-5", Package="SOT-753 Diodes Inc.", Availability=Unavailable, MF="Diodes Inc.", MP=AP2112K-3.3TRG1, Price=None, SnapEDA_Link=https://www.snapeda.com/parts/AP2112K-3.3TRG1/Diodes%20Inc./view-part/?ref=snap
X1: library part XTAL_SMD2016_32MHz_8pF_Epson, "XTAL SMD 2016, 32MHz, Cl=8pF, Total Tol: ±40ppm", Manufacturer="Epson Toyocom", Manufacturer Part Number=Q22FA12800025, Supplier part number=171-2806, Artikkelnr Noca=N.A., Artikkelnr Simpro=N.A., Datasheet=http://www.epsondevice.com/docs/qd/en/DownloadServlet?id=ID000449, Footprint Doc=XTAL_2016, LatestRevisionDate=2014-11-27, Note="XTAL SMD 32.000MHz", Part Number=XTAL_SMD2016_32MHz_8pF_Epson, Pin Count=4, Published=2012-03-09, Publisher="Nordic Semiconductor", Supplier=Farnell
X2: library part CMP-0447-00001-2, "Crystal, 32.768 kHz, 12.5 pF, -40 to 85 degC, SMD Low Profile 3.2 x 1.5 x 0.9 mm, Tape and Reel", Equivalent Series Resistance (R1)="70 Kohm", Frequency="32.768 kHz", Frequency Tolerance @+25degC="+/- 20 ppm", Insulation Resistance (Min)="500 Mohm", Load Capacitance (CL)="12.5 pF", Manufacturer=Abracon, Operating Temperature="-40 to 85 degC", PartNumber=ABS07-32.768KHz-T, Q Value (Type)=30000, Shunt Capacitance (C0)="0.9 to 1.2 pF", ComponentLink1Description="Manufacturer URL", ComponentLink1URL=http://www.abracon.com/, ComponentLink2Description=Datasheet, ComponentLink2URL=http://www.abracon.com/Resonators/ABS07.pdf, ComponentLink3Description="Package Specification", ComponentLink3URL=http://www.abracon.com/Resonators/ABS07.pdf, DatasheetVersion=04.03.13, Drive Level (Type)="0.1 uW", Mounting Technology="Surface Mount", Operation Mode="Flexural Mode (Tuning Fork)", PackageDescription="2-Pin Hand Drawn, Body 3.2x1.5mm, Pitch 2.5mm", PackageReference=ABS07-2, Packing="Tape and Reel"

## Via types
v1: diameter 50, hole 28, Top Layer to Bottom Layer, 16 vias
v2: diameter 25.98, hole 12.99, Top Layer to Bottom Layer, 16 vias

## Nets (pads, with @x,y where several pads share a name; then routed paths per layer and width w, separated by ;. In a path a pad name is that pad's centre, name@x,y a point inside that pad or via, vN(x,y) a via of type N, cw(c..) or ccw(c..) an arc to the next point about the centre after c; other vN are vias at no path point)
+3V3: C1.1 C2.1 C3.1 C4.1 C5.1 C7.1 C8.1 C13.1 C18.1 C21.1 C24.1 C25.1 C26.1 C28.1 P1.1 R1.2 R2.2 R3.2 R4.2 R5.2 R6.2 R7.2 R8.2 R14.2 R15.2 U1.8 U2.3 U2.8 U3.13 U3.36 U3.48 U4.8 U4.13 U5.1 U5.14 U7.3 U7.4 U8.5 | length 6478.1
  Top Layer w8: P1.1 271.29,2896.61 282.85,2908.17 282.85,2957.08 289.7,2963.93 C26.1 291.91,2964.17 R14.2 407.22,2979.72 427.5,3000 467.5,3000 863.48,2604.02 ; U7.3 950.85,2398.03 C7.1 ; C21.1 1038.84,1070.47 1049.25,1060.07 1111.5,1060.07 1120.31,1051.26 U8.5 1120.31,1021.73 1147.73,994.31 1408.19,994.31 1440,1026.12 R15.2 1422.33,1051.66 1422.33,1627.85 1396.85,1653.33 C13.1 ; C28.1@1050.53,1513.84 1077.5,1540.81 1077.5,1712.5 1140.91,1775.91 U3.36 ; R3.2 R3.2@1086.16,2363.97 ; R6.2 1136.3,2313.84 R3.2@1086.16,2363.97 ; R5.2 1174.68,2139.31 1232.84,2197.46 1232.84,2572.84 1260,2600 1303.35,2600 R2.2@1321.54,2581.8 ; U3.48 1398.43,1708.41 C13.1@1398.43,1659.31 ; U3.13 1375.66,2027.45 1375.66,2045.99 1378.56,2048.9 C18.1 ; 1371.38,2051.81 1409.15,2089.59 1603.09,2089.59 1733.91,2220.4 C1.1 1787.51,2220.4 1802.58,2205.34 U5.1 1807.5,2239.31 1831.75,2263.56 1871.25,2263.56 C2.1@1877.78,2270.09 ; U1.8 R4.2@1701.65,2473.97 ; R4.2 R4.2@1701.65,2473.97 ; C5.1 1866.38,1578.99 U4.8 1867.71,1633.2 1867.71,1645.69 1875.34,1653.33 U4.13 2009.92,1653.33 C4.1 2022.5,1665.75 2022.5,1786.81 1996.06,1813.25 R7.2 ; U5.14 C2.1@1877.78,2270.09 ; C3.1 C2.1 C2.1@1877.78,2270.09 ; 863.48,2604.02 863.48,2715.98 891.4,2743.9 U2.3 968.48,2743.9 1067.75,2843.17 1125.23,2843.17 U2.8 C25.1 1225.54,2843.9 1250.95,2869.31 1280,2869.31 1329.37,2819.94 R2.2 1357.89,2602.5 1423.56,2602.5 R1.2 1480.61,2602.5 1602.54,2602.5 1631.06,2573.97 C24.1 1633.03,2542.6 R4.2@1701.65,2473.97 ; 863.48,2604.02 863.48,2404.87 870.32,2398.03 C7.1 ; C7.1 C8.1 873.81,2354.55 U7.4 952.01,2354.05 986.75,2319.31 1041.5,2319.31 R3.2@1086.16,2363.97
ACCEL_CS: P5.4 R8.1 U3.10 U5.8 | length 909.5
  Top Layer w8: U3.10 1867.4,1934.43 R8.1 1954.78,2021.81 v1(1955,2021.81) ; v1(1797.5,2021.81) 1811.81,2021.81 1873.89,2083.89 1873.89,2116.21 U5.8
  Bottom Layer w8: v1(1797.5,2021.81) v1(1955,2021.81)
ACCEL_INT1: U3.11 U5.11 | length 724.3
  Top Layer w8: U3.11 1825.18,1950.18 1935,2060 1935,2149.98 1919.01,2165.97 U5.11
ACCEL_INT2: U3.12 U5.9 | length 631.5
  Top Layer w8: U3.12 1808.43,1965.93 1908.68,2066.18 U5.9
CATHODE: U7.2 U7.5 | length 107.5
  Top Layer w8: U7.2 952.01,2438.7 979.57,2411.14 979.57,2382.6 1007.13,2355.04 U7.5
COIL1: C22.1 D2.1 D3.2 | length 450.5
  Top Layer w8: D2.1 1979.33,260.51 D3.2 1980,80.47 C22.1
CS_MEM: P7.4 R1.1 U1.1 U3.14 | length 738.5
  Top Layer w8: U1.1 1330.28,2464.72 1397.5,2397.5 1397.5,2244.31 v1@1407.72,2234.09 ; U3.14 1330.87,2040.88 1421,2131.02 1454.21,2131.02 v1(1455,2131.81) ; U1.1@1338.54,2473.97 1330.28,2482.24 1330.28,2487.6 R1.1
  Bottom Layer w8: v1@1410,2231.81 1417.5,2231.81 1455,2194.31 v1(1455,2131.81)
  other v1: 1410,2239.31
DEC1: C12.1 U3.1 | length 116.8
  Top Layer w8: U3.1 1387.95,1792.7 1411.34,1769.31 C12.1
DEC2: C16.2 U3.32 | length 71
  Top Layer w8: C16.2@1070,1855.5 1140.72,1855.5 U3.32
DEC3: C15.1 U3.33 | length 83.8
  Top Layer w8: C15.1 1100.41,1839.94 U3.33
DEC4: C10.2 L5.2 U3.46 | length 231.1
  Top Layer w8: L5.2 1315.71,1554.19 1345,1583.48 1345,1706.48 1315.12,1736.36 U3.46
GND: C1.2 C2.2 C3.2 C4.2 C5.2 C6.2 C7.2 C8.2 C9.1 C10.1 C11.1 C12.2 C13.2 C14.1 C15.2 C16.1 C17.1 C18.2 C19.1 C20.2 C21.2 C22.2 C23.2 C24.2 C25.2 C26.2 C28.2 C29.1 C30.1 D1.1 D4.2 DS2.2 DS3.1 L3.1 P1.3 P1.5 P2.2 P3.2 P4.3 Q1.2 R11.1 R13.1 U1.4 U1.9 U2.4 U3.31 U3.45 U3.49 U4.18 U4.20 U5.12 U5.13 U5.16 U6.2 U7.1 U8.2 X1.2 X1.4 | length 475.6
  Top Layer w8: C28.2 1020,1510.53 C21.2 ; U3.45 1299.37,1711.4 1315.12,1695.65 C10.1
GYRO_CS: P6.4 R7.1 U3.7 U4.22 | length 593.5
  Top Layer w8: U3.7 1808.35,1887.18 1882.13,1813.4 U4.22
GYRO_INT1: U3.8 U4.12 | length 1024.9
  Top Layer w8: U3.8 1931.38,1902.93 2072.5,1761.81 2072.5,1635 2065,1627.5 U4.12@1929.37,1627.5
GYRO_INT2: U3.9 U4.19 | length 806.8
  Top Layer w8: U3.9 1379.45,1918.32 1975.99,1918.32 v1(1980,1914.31) ; U4.19 1929.37,1761.79 1930.7,1763.12 1956.9,1763.12 1968.09,1774.31 v1(1980,1774.31)
  Bottom Layer w8: v1(1980,1774.31) v1(1980,1914.31)
I2C_SCL: P8.1 R5.1 U2.6 U3.22 U7.8 | length 1072
  Top Layer w8: U2.6 1161.4,2743.9 1202.5,2702.79 1202.5,2677.38 1007.13,2482.01 U7.8 1007.13,2481.02 1017.91,2470.24 1086.95,2470.24 1201.18,2356.01 1201.18,2185.49 1185,2169.31 1155.91,2169.31 1136.3,2149.71 R5.1 1136.3,2117.14 1204.88,2048.56 U3.22
I2C_SDA: P8.2 R6.1 U2.5 U3.23 U7.7 | length 1000.1
  Top Layer w8: U2.5 1090.53,2693.9 980,2583.37 980,2466.81 1007.13,2439.69 U7.7 1010.37,2442.43 1086.88,2442.43 1173.7,2355.61 R6.1 1173.7,2195.51 1162.5,2184.31 1135,2184.31 1090,2139.31 1090,2115 1189.13,2015.87 U3.23
IR_INT: R3.1 U3.6 U7.6 | length 81.3
  Top Layer w8: U7.6 1084.76,2396.87 R3.1 R3.1@1087.32,2396.63
NetC6_1: C6.1 U4.10 | length 62.8
  Top Layer w8: U4.10 1897.87,1585.22 1907.87,1575.22 C6.1
NetC17_2: C17.2 L1.1 U3.30 | length 446.4
  Top Layer w8: C17.2 786.18,2009.23 797.75,1997.67 797.75,1996.48 837.86,1956.37 L1.1 839.63,1887.54 1140.55,1887.54 U3.30
NetC27_1: C27.1 L2.1 L3.2 | length 204.6
  Top Layer w8: L3.2 632.86,1891.48 L2.1 C27.1
NetC29_2: C29.2 U3.38 | length 58.8
  Top Layer w8: C29.2 1170,1713.31 1189.13,1732.44 U3.38
NetC30_2: C30.2 U3.37 | length 82.1
  Top Layer w8: C30.2 1115,1713.31 1160.45,1758.76 1172.52,1758.76 1173.39,1759.62 U3.37
NetD3_1: D3.1 D4.1 | length 122.7
  Top Layer w8: D3.1 D4.1
NetDS1_1: DS1.1 R10.1 | length 157.5
  Top Layer w8: DS1.1 793.97,853.79 R10.1
NetDS1_2: DS1.2 U6.1 | length 439.7
  Top Layer w8: DS1.2 845,855.91 988.41,712.5 1163.81,712.5 1179.68,728.37 1179.68,729.84 1195.12,745.28 U6.1
NetDS2_1: DS2.1 R12.1
NetDS3_2: DS3.2 R15.1 | length 100.8
  Top Layer w8: R15.1 DS3.2
NetE1_1: E1.1 L2.2
NetL4_1: L4.1 U3.47 | length 434.8
  Top Layer w8: L4.1 1322.99,1364.86 1365,1406.87 1365,1710 1330.87,1744.13 U3.47
NetL4_2: L4.2 L5.1 | length 90.1
  Top Layer w8: L4.2 L5.1
NetQ1_1: Q1.1 R16.1 | length 120.4
  Top Layer w8: Q1.1 1554.29,818.72 R16.1
NetQ1_3: Q1.3 R9.1 U8.3 | length 272.6
  Top Layer w8: U8.3 1188.7,936.77 R9.1 1189.23,844.31 Q1.3
NetR11_2: R11.2 U6.5 | length 80
  Top Layer w8: U6.5 1197.87,659.84 R11.2
NetU2_1: U2.1 X2.2 | length 162.7
  Top Layer w8: X2.2 851.48,2890.04 897.62,2843.9 U2.1
NetU2_2: U2.2 X2.1 | length 144.5
  Top Layer w8: X2.1 791.79,2793.9 U2.2
nRESET: P1.10 U3.24 | length 1066.2
  Top Layer w8: P1.10 430,2639.31 1070.91,1998.41 U3.24
P0.27: U3.39
P0.28/AIN4: U3.40
RF: C27.2 L1.2 | length 72.4
  Top Layer w8: C27.2 L1.2
RST_CLK: R13.2 U2.7 U3.29 | length 133.7
  Top Layer w8: U2.7 1259.07,2793.9 R13.2
RX: P4.2 U3.27 | length 993.5
  Top Layer w8: P4.2 560,2399.31 1024.88,1934.43 U3.27
SPI_HOLD: R4.1 U1.7 U3.19 | length 815.1
  Top Layer w8: U3.19 1252.13,2196.44 v1@1292.5,2236.81 ; v1@1497.5,2244.31 1507.5,2244.31 1580.23,2317.04 1580.23,2379.44 1624.76,2423.97 U1.7 1634.77,2425.71 1698.83,2425.71 R4.1
  Bottom Layer w8: v1@1292.5,2236.81 v1(1292.5,2239.31) 1292.5,2241.81 1325,2274.31 1467.5,2274.31 v1@1497.5,2244.31
  other v1: 1487.5,2239.31
SPI_MISO: P5.2 U3.16 U5.7 | length 1011.4
  Top Layer w8: U3.16 1299.37,2056.18 1433.02,2189.83 1498.89,2189.83 1633.03,2323.97 ; v1(1682.5,2021.81) 1729.45,2068.76 1828.76,2068.76 1854.2,2094.2 1854.2,2116.21 U5.7
  Bottom Layer w8: v1@1552.5,2239.31 1552.5,2151.81 v1(1682.5,2021.81) ; v1@1552.5,2241.81 1557.5,2241.81 v1(1560,2239.31)
SPI_MISO1: P6.2 U3.5 U4.24 | length 528.5
  Top Layer w8: U3.5 1424.41,1855.69 1442.03,1873.31 1551,1873.31 1670.79,1753.52 U4.24
SPI_MISO2: P7.2 U1.5 U3.42
SPI_MOSI: P5.1 U3.17 U5.6 | length 1068
  Top Layer w8: U3.17 1283.62,2093.56 1369.37,2179.31 v1(1372.5,2179.31) ; 1330.28,2423.97 1338.54,2423.97 1375,2387.52 v1@1375,2184.94 ; v1(1577.5,2021.81) 1655.69,2100 1823.23,2100 1838.41,2115.18 U5.6
  Bottom Layer w8: v1(1372.5,2179.31) 1372.5,2160 1510.69,2021.81 v1(1577.5,2021.81)
SPI_MOSI1: P6.1 U3.4 U4.9 | length 768.6
  Top Layer w8: U3.4 1425.63,1839.94 1447,1861.31 1500.23,1861.31 1847.47,1514.07 1873.79,1514.07 1882.13,1522.41 U4.9
SPI_MOSI2: P7.1 U1.2 U3.41
SPI_SCLK: P5.3 U3.15 U5.4 | length 1010.6
  Top Layer w8: U3.15 1315.12,2050.12 1442.83,2177.83 1601.02,2177.83 1672.5,2249.31 1672.5,2339.31 1646.57,2365.24 1646.57,2368.71 1644.54,2370.74 ; 1633.03,2373.97 1636.27,2370.74 1644.54,2370.74 ; v1(1732.5,2367.5) 1729.26,2370.74 1644.54,2370.74 ; v1(1752.5,2150) 1754.36,2148.14 1805.64,2148.14 U5.4
  Bottom Layer w8: v1(1732.5,2367.5) 1735,2367.5 1752.5,2350 v1(1752.5,2150)
SPI_SCLK1: P6.3 U3.3 U4.23 | length 519.8
  Top Layer w8: U3.3 1379.45,1823.83 v1@1469.52,1823.83 ; v1(1715,1820.61) 1810.37,1820.61 1861.96,1769.02 1861.96,1766.21 1866.38,1761.79 U4.23
  Bottom Layer w8: v1@1475,1829.31 1483.7,1820.61 v1(1715,1820.61)
  other v1: 1475,1820.61
SPI_SCLK2: P7.3 U1.6 U3.43
SPI_W: R2.1 U1.3 U3.18 | length 650.8
  Top Layer w8: U3.18 1267.87,2137.18 1360,2229.31 1360,2352.52 1338.54,2373.97 U1.3 1322.01,2373.97 1301.76,2394.22 1301.76,2566.15 R2.1
SWDCLK: P1.4 U3.20 U3.25 | length 1299.3
  Top Layer w8: P1.4 389.65,2846.61 360,2816.96 360,2674.31 1068.39,1965.93 U3.25
SWDIO: P1.2 R14.1 U3.21 U3.26 | length 1467.3
  Top Layer w8: R14.1 441.57,2959.15 441.57,2908.17 P1.2 389.65,2896.61 340,2846.96 340,2659.31 1049.13,1950.18 U3.26
TX: P4.1 U3.28 | length 958.6
  Top Layer w8: P4.1 367.51,2271.8 657.51,2271.8 1010.63,1918.68 U3.28
VBAT: C19.2 C20.1 P2.1 P3.1 R9.2 U6.3 U8.1 | length 1573.3
  Top Layer w8: P2.1 P2.1@335,944.84 ; C20.1 538.03,626.81 521.06,609.84 P3.1 360.62,635.47 360.62,919.22 P2.1@335,944.84 ; U6.3 1120.31,813.86 1139.54,833.08 1139.54,834.06 R9.2@1150.32,844.84 ; R9.2 R9.2@1150.32,844.84 ; P2.1@335,944.84 C19.2 1118.66,944.84 U8.1 1120.31,875.83 1139.54,856.61 1139.54,855.62 R9.2@1150.32,844.84
VBUS: C9.2 C23.1 D1.2 D2.2 R10.2 R12.2 R16.2 U6.4 | length 1489
  Top Layer w8: R10.2 896.47,704.84 916.12,685.19 1109.53,685.19 1120.31,674.41 U6.4 1120.31,650.79 1142.87,628.23 C23.1 C23.1@1145,549.68 ; C9.2 C23.1@1145,549.68 ; R16.2 1555,779.63 1396.8,621.43 R12.2 ; D2.2 D1.2 1397.47,540.51 R12.2 ; C23.1@1145,549.68 1149.72,544.97 1393.01,544.97 R12.2
XC1: C14.2 U3.34 X1.1 | length 467.4
  Top Layer w8: C14.2 933.31,1567.22 933.31,1607.02 X1.1 907.58,1617.42 885,1640 885,1690 948.08,1753.08 1054.64,1753.08 1125.75,1824.19 U3.34
XC2: C11.2 U3.35 X1.3 | length 254.8
  Top Layer w8: X1.3 1042.44,1662.7 C11.2 1045,1722.53 1130.91,1808.44 U3.35
pads on no net: E1.2 P1.6 P1.7 P1.8 P1.9 U3.2 U3.44 U4.1 U4.2 U4.3 U4.4 U4.5 U4.6 U4.7 U4.11 U4.14 U4.15 U4.16 U4.17 U4.21 U5.2 U5.3 U5.5 U5.10 U5.15 U8.4
copper on no net: